# Altium PCB Power.PcbDoc (part 2 of 2)
Units mil, origin at the board's own origin, x right, y up, seen from the top; angles counter-clockwise.
Board outline 3000 x 2825 mil, 4 copper layers (Top Layer, Layer 1, Layer 2, Bottom Layer), stack 26.556 mil thick; 35 components, 15 nets, 160 pads, 64 vias.
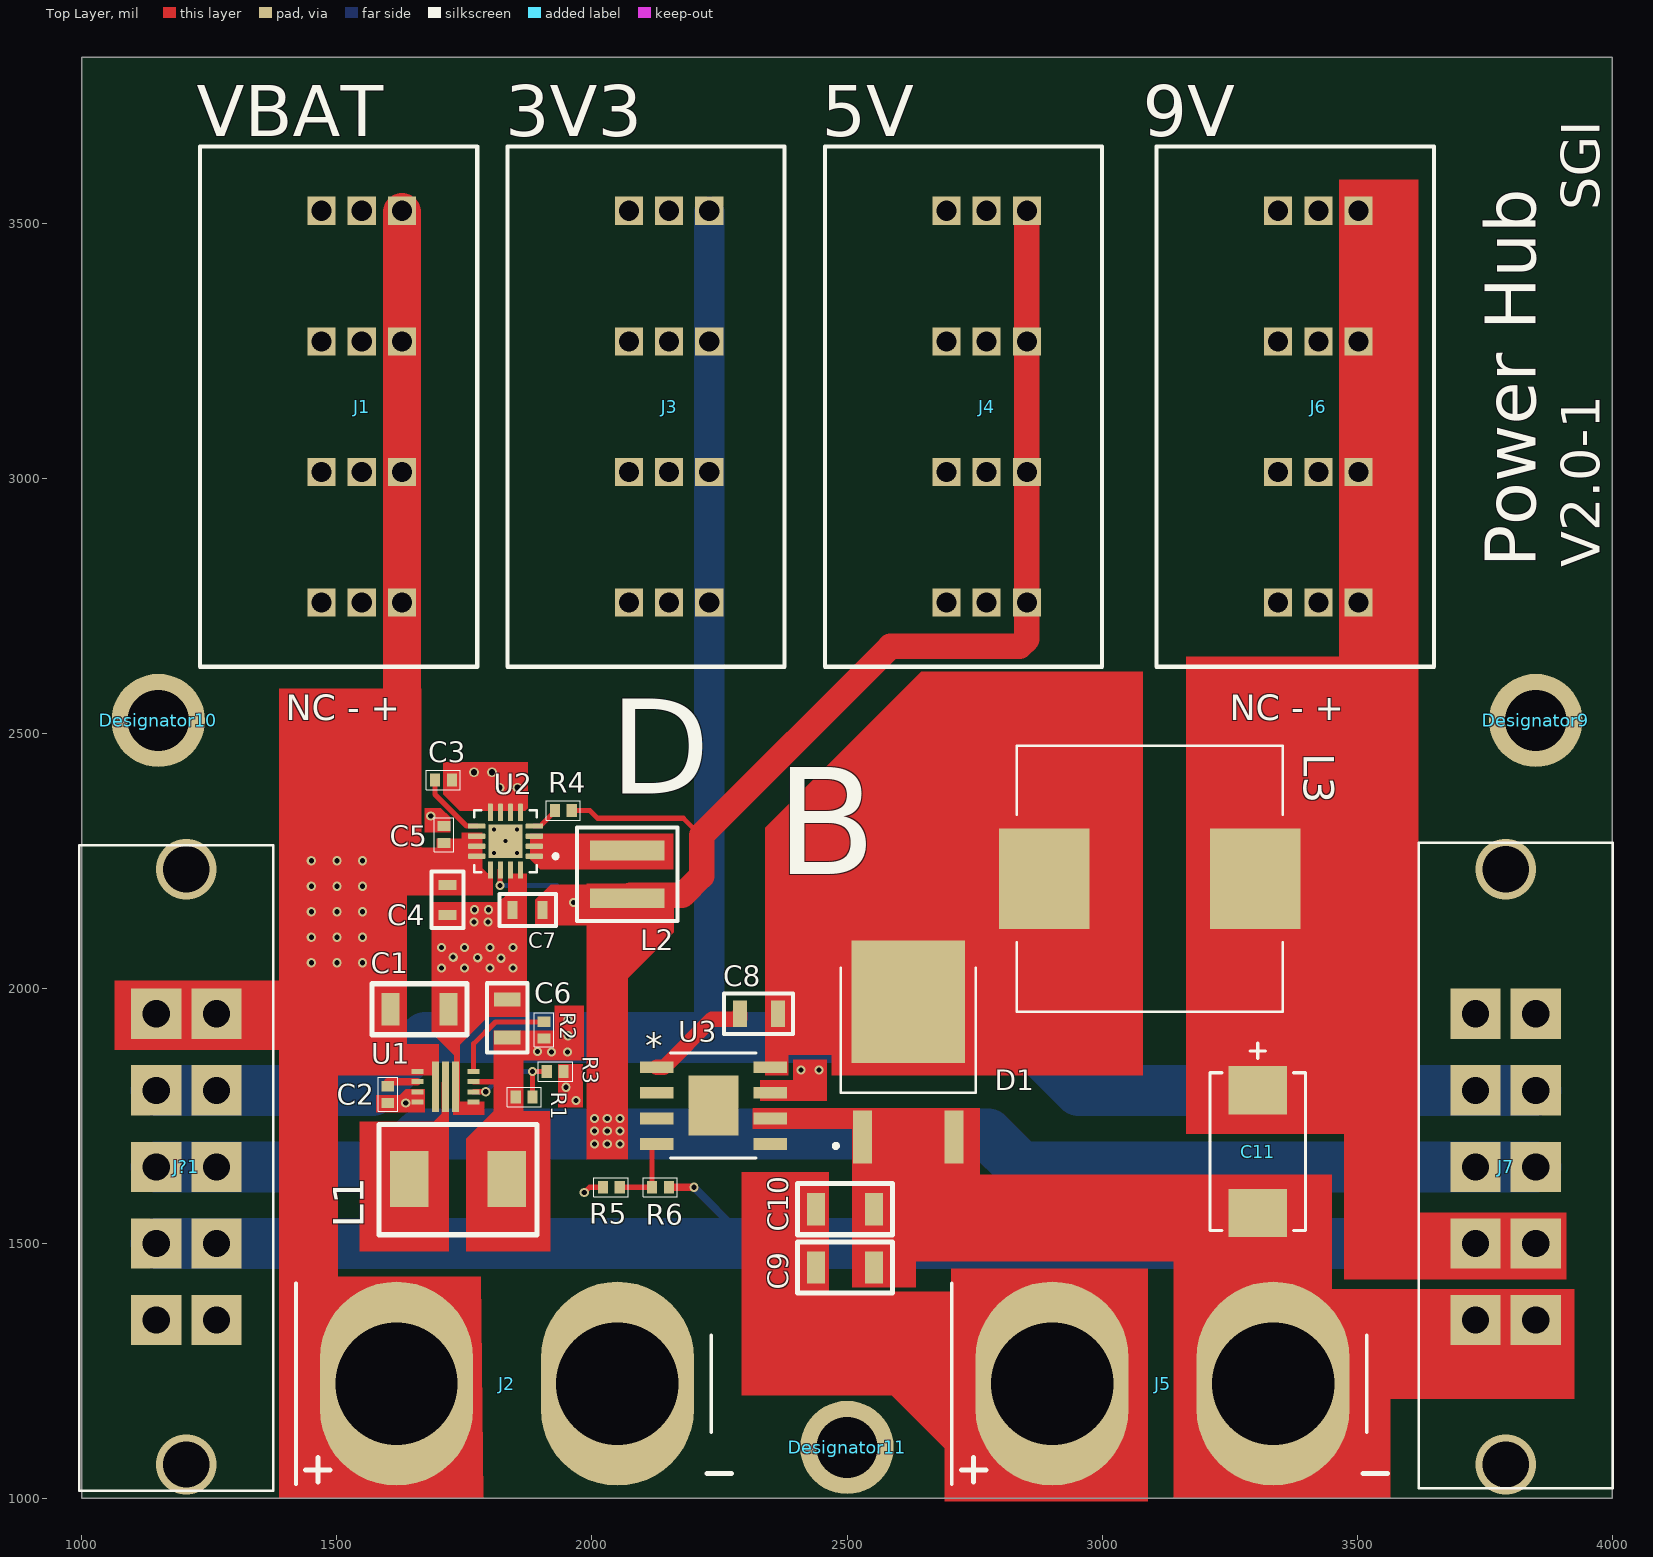
[diagram p0: Top Layer view]

## Part data (continued)
R5: library part CRCW04021K58FKED, "RES SMD 1.58K OHM 1% 1/16W 0402", Capacitance=10uF, Case/Package=0603, Case Code (Metric)=1608, Dielectric=X5R, Dielectric Material=Ceramic, Max Operating Temperature=85°C, Min Operating Temperature=-55°C, Package Quantity=1, Supplier Part Number 1=541-1.58KLCT-ND, Tolerance=20%, Voltage Rating=25V, Case Code (Imperial)=0603, ComponentLink1Description=http://components.arrow.com/part/dataview/0323_06887183?src-supplier=Arrow+Europe, ComponentLink1URL=http://components.arrow.com/part/dataview/0323_06887183?src-supplier=Arrow+Europe, ComponentLink2Description=http://www.farnell.com/datasheets/2792994.pdf?src-supplier=Farnell, ComponentLink2URL=http://www.farnell.com/datasheets/2792994.pdf?src-supplier=Farnell, ComponentLink3Description=http://www.farnell.com/datasheets/2291921.pdf?src-supplier=Avnet, ComponentLink3URL=http://www.farnell.com/datasheets/2291921.pdf?src-supplier=Avnet, ComponentLink4Description=http://www.farnell.com/datasheets/2792994.pdf?src-supplier=Newark, ComponentLink4URL=http://www.farnell.com/datasheets/2792994.pdf?src-supplier=Newark, ComponentLink5Description=http://www.farnell.com/datasheets/2291921.pdf?src-supplier=Newark, ComponentLink5URL=http://www.farnell.com/datasheets/2291921.pdf?src-supplier=Newark, ComponentLink6Description=http://www.farnell.com/datasheets/2792994.pdf?src-supplier=Element14, ComponentLink6URL=http://www.farnell.com/datasheets/2792994.pdf?src-supplier=Element14, ComponentLink7Description=http://www.farnell.com/datasheets/1913358.pdf?src-supplier=Element14, ComponentLink7URL=http://www.farnell.com/datasheets/1913358.pdf?src-supplier=Element14, ComponentLink8Description=https://product.tdk.com/info/en/catalog/datasheets/mlcc_commercial_general_en.pdf?src-supplier=Digi-Key, ComponentLink8URL=https://product.tdk.com/info/en/catalog/datasheets/mlcc_commercial_general_en.pdf?src-supplier=Digi-Key, ComponentLink9Description=http://www.farnell.com/datasheets/2291921.pdf?src-supplier=RSComponents, ComponentLink9URL=http://www.farnell.com/datasheets/2291921.pdf?src-supplier=RSComponents, ComponentLink10Description=http://www.farnell.com/datasheets/2291921.pdf?src-supplier=Verical, ComponentLink10URL=http://www.farnell.com/datasheets/2291921.pdf?src-supplier=Verical, ComponentLink11Description=http://www.farnell.com/datasheets/2291921.pdf?src-supplier=Mouser, ComponentLink11URL=http://www.farnell.com/datasheets/2291921.pdf?src-supplier=Mouser, ComponentLink12Description=http://www.farnell.com/datasheets/2291921.pdf?src-supplier=Quest, ComponentLink12URL=http://www.farnell.com/datasheets/2291921.pdf?src-supplier=Quest, ComponentLink13Description=http://www.farnell.com/datasheets/2291921.pdf?src-supplier=TTI, ComponentLink13URL=http://www.farnell.com/datasheets/2291921.pdf?src-supplier=TTI, Composition=Ceramic, Depth=0.8mm, Height=0.8mm, Lead Free="Lead Free", Length=1.6mm, Mount="Surface Mount", Packaging="Tape and Reel", REACH SVHC="No SVHC", RoHS=Yes, Supplier 1=Digi-Key, Termination=SMD/SMT, Thickness=0.039inch, Voltage Rating (DC)=25V, Weight=7.1E-05oz, Width=0.8mm
R6: library part CRCW040210K0FKEDC, "RES SMD 10K OHM 1% 1/16W 0402", Capacitance=10uF, Case/Package=0603, Case Code (Metric)=1608, Dielectric=X5R, Dielectric Material=Ceramic, Max Operating Temperature=85°C, Min Operating Temperature=-55°C, Package Quantity=1, Supplier Part Number 1=541-3959-1-ND, Tolerance=20%, Voltage Rating=25V, Case Code (Imperial)=0603, ComponentLink1Description=http://components.arrow.com/part/dataview/0323_06887183?src-supplier=Arrow+Europe, ComponentLink1URL=http://components.arrow.com/part/dataview/0323_06887183?src-supplier=Arrow+Europe, ComponentLink2Description=http://www.farnell.com/datasheets/2792994.pdf?src-supplier=Farnell, ComponentLink2URL=http://www.farnell.com/datasheets/2792994.pdf?src-supplier=Farnell, ComponentLink3Description=http://www.farnell.com/datasheets/2291921.pdf?src-supplier=Avnet, ComponentLink3URL=http://www.farnell.com/datasheets/2291921.pdf?src-supplier=Avnet, ComponentLink4Description=http://www.farnell.com/datasheets/2792994.pdf?src-supplier=Newark, ComponentLink4URL=http://www.farnell.com/datasheets/2792994.pdf?src-supplier=Newark, ComponentLink5Description=http://www.farnell.com/datasheets/2291921.pdf?src-supplier=Newark, ComponentLink5URL=http://www.farnell.com/datasheets/2291921.pdf?src-supplier=Newark, ComponentLink6Description=http://www.farnell.com/datasheets/2792994.pdf?src-supplier=Element14, ComponentLink6URL=http://www.farnell.com/datasheets/2792994.pdf?src-supplier=Element14, ComponentLink7Description=http://www.farnell.com/datasheets/1913358.pdf?src-supplier=Element14, ComponentLink7URL=http://www.farnell.com/datasheets/1913358.pdf?src-supplier=Element14, ComponentLink8Description=https://product.tdk.com/info/en/catalog/datasheets/mlcc_commercial_general_en.pdf?src-supplier=Digi-Key, ComponentLink8URL=https://product.tdk.com/info/en/catalog/datasheets/mlcc_commercial_general_en.pdf?src-supplier=Digi-Key, ComponentLink9Description=http://www.farnell.com/datasheets/2291921.pdf?src-supplier=RSComponents, ComponentLink9URL=http://www.farnell.com/datasheets/2291921.pdf?src-supplier=RSComponents, ComponentLink10Description=http://www.farnell.com/datasheets/2291921.pdf?src-supplier=Verical, ComponentLink10URL=http://www.farnell.com/datasheets/2291921.pdf?src-supplier=Verical, ComponentLink11Description=http://www.farnell.com/datasheets/2291921.pdf?src-supplier=Mouser, ComponentLink11URL=http://www.farnell.com/datasheets/2291921.pdf?src-supplier=Mouser, ComponentLink12Description=http://www.farnell.com/datasheets/2291921.pdf?src-supplier=Quest, ComponentLink12URL=http://www.farnell.com/datasheets/2291921.pdf?src-supplier=Quest, ComponentLink13Description=http://www.farnell.com/datasheets/2291921.pdf?src-supplier=TTI, ComponentLink13URL=http://www.farnell.com/datasheets/2291921.pdf?src-supplier=TTI, Composition=Ceramic, Depth=0.8mm, Height=0.8mm, Lead Free="Lead Free", Length=1.6mm, Mount="Surface Mount", Packaging="Tape and Reel", REACH SVHC="No SVHC", RoHS=Yes, Supplier 1=Digi-Key, Termination=SMD/SMT, Thickness=0.039inch, Voltage Rating (DC)=25V, Weight=7.1E-05oz, Width=0.8mm
U1: "3-17V 4.0A Step-Down Converter with 1% accuracy and PFM/Forced-PWM in 2x3QFN", Case/Package=VQFN, Manufacturer 1="Texas Instruments", Max Input Voltage=17V, Max Operating Temperature=125°C, Max Output Voltage=12V, Min Input Voltage=3V, Min Operating Temperature=-40°C, Min Output Voltage=800mV, Output Current=4A, Supplier Part Number 1=296-50117-1-ND, Switching Frequency=1MHz, ComponentLink1Description=http://www.ti.com/lit/ds/symlink/tps62136.pdf?src-supplier=Digi-Key, ComponentLink1URL=http://www.ti.com/lit/ds/symlink/tps62136.pdf?src-supplier=Digi-Key, Manufacturer Part Number 1=TPS621361RGXR, Mount="Surface Mount", Number of Outputs=1, Number of Pins=11, Output Configuration=Positive, Output Type=Adjustable, Packaging="Cut Tape", Pricing 1="1=2.15000, 10=1.93500, 25=1.82520, 100=1.46000, 250=1.27752, 500=1.24100, 1000=0.98550 (USD)", RoHS=No, Stock 1=3019, Supplier 1=Digi-Key, Synchronous Rectifier=Yes
U2: "Buck Switching Regulator IC Positive Fixed 5V 1 Output 3A 16-VFQFN Exposed Pad", Package="VQFN-16 Texas Instruments", Supplier Part Number 1=296-40835-1-ND, Availability=Unavailable, MF="Texas Instruments", MP=TPS62133AQRGTRQ1, Price=None, SnapEDA_Link=https://www.snapeda.com/parts/TPS62133AQRGTRQ1/Texas%20Instruments/view-part/454614/?ref=snap, Supplier 1=Digi-Key
U3: "IC REG BUCK ADJUSTABLE 5A 8SOPWR", Supplier Part Number 1=296-23750-1-ND, Supplier 1=Digi-Key

## Via types
v1: diameter 18, hole 10, Top Layer to Bottom Layer, tented both sides, 56 vias
v2: diameter 19, hole 12, Top Layer to Bottom Layer, tented both sides, 4 vias
v3: diameter 118.11, hole 90.55, Top Layer to Bottom Layer, tented both sides, 4 vias

## Nets (pads, with @x,y where several pads share a name; then routed paths per layer and width w, separated by ;. In a path a pad name is that pad's centre, name@x,y a point inside that pad or via, vN(x,y) a via of type N, cw(c..) or ccw(c..) an arc to the next point about the centre after c; other vN are vias at no path point)
3V3: C6.2 J3.1 J3.4 J3.7 J3.10 J7.4 J?1.2 L1.2 R1.1 R2.1 U1.6 | length 4466
  Top Layer w10: U1.6 1825.84,1816.84 1826,1817
  Bottom Layer w60: 2217,1904 2230,1904 2230,2754.09 2230,3010 2230,3265.91 J3.1@2230,3521.81
  Bottom Layer w100: J?1.2@1145.94,1800 1264.06,1800 1569.49,1800 1673.49,1904 2217,1904 ; 2230,1904 2850.74,1904 2954.74,1800 3731.89,1800 J7.4@3850,1800
  other v1: 1921,1875 1952,1875 1893,1876 1953,1907 1953,1939
5V: C7.2 J4.1 J4.4 J4.7 J4.10 J7.3 J?1.3 L2.2 R4.1 U2.14 | length 5101.9
  Top Layer w10: v1(1820,2201.35) 1820,2231.85 U2.14 ; R4.1 1995.73,2348.35 2010.73,2333.35 2179,2333.35 2213.67,2298.67
  Top Layer w50: L2.2 2074.71,2182.4 2177.4,2182.4 2215,2220 2215,2300 2585,2670 2838.19,2670 2852.48,2684.29 2852.48,2758.19 2852.48,3014.09 2852.48,3270 J4.1@2852.48,3525.91
  Bottom Layer w10: v1(1820,2201.35) 1931,2201.35 v1(1964,2168.35)
  Bottom Layer w100: J?1.3@1145.94,1650 1264.06,1650 1600.51,1650 1664.51,1714 2776,1714 2840,1650 3731.89,1650 J7.3@3850,1650
  other v1: 2005,1695 2030,1695 2055,1695 2005,1720 2030,1720 2055,1720 2005,1745 2030,1745 2055,1745
9V: C11.1 J6.1 J6.4 J6.7 J6.10 J7.2 J?1.4 L3.2 R6.1 | length 2900.3
  Top Layer w15: R6.1 v1(2200,1610)
  Bottom Layer w15: v1(2200,1610) 2290,1520 2290,1500
  Bottom Layer w100: J?1.4@1145.94,1500 1264.06,1500 2290,1500 3731.89,1500 J7.2@3850,1500
FB: R1.2 R3.1 U1.5 | length 209.8
  Top Layer w10: U1.5 v1(1791.95,1797.16) ; R1.2 v1(1883.54,1837) R3.1
  Bottom Layer w10: v1(1791.95,1797.16) 1831.79,1837 v1(1883.54,1837)
GND: C1.1 C2.1 C3.1 C4.1 C5.1 C6.1 C7.1 C9.1 C10.1 C11.2 D1.1 D1.3 J1.2 J1.5 J1.8 J1.11 J2.2 J3.2 J3.5 J3.8 J3.11 J4.2 J4.5 J4.8 J4.11 J5.2 J6.2 J6.5 J6.8 J6.11 J7.1 J?1.5 R3.2 R5.2 U1.3 U1.4 U1.10 U1.11 U2.5 U2.6 U2.7 U2.8 U2.15 U2.16 U2.17 U2.17_1 U2.17_2 U2.17_3 U2.17_4 U2.17_5 U3.6 | length 40.6
  Top Layer w10: v1(1985,1600) 1995,1610 R5.2
  other v1: 1635,1775 1969,1780 1949,1806 1705,2040 1750,2040 1800,2040 1845,2040 1822,2059 1776,2060 1728,2061 1705,2080 1750,2080 1800,2080 1845,2080 1769,2130 1796,2130 1770,2154 1797,2154 1684,2338
  other v2: 1819,2393.35 1854,2393.35 1769,2423.35 1804,2423.35
NetC8_1: C8.1 U3.1 | length 212.2
  Top Layer w30: U3.1 2141,1845 2235.41,1939.41 2288.78,1939.41 2290,1940.63 C8.1
NetC8_2: C8.2 D1.2 L3.1 U3.8
NetR5_2: R5.1 R6.2 U3.4 | length 153.4
  Top Layer w10: R5.1 R6.2 2118,1688.5 2124.5,1695 U3.4
PG: R4.2 U2.4 | length 54.5
  Top Layer w10: U2.4 1898.84,2317.87 1921.91,2340.94 1922.46,2340.94 1927.46,2345.94 R4.2
PG3: R2.2 U1.7 | length 210.5
  Top Layer w10: U1.7 1768.12,1891.26 1810.86,1934 1905.46,1934 R2.2
PVIN: C1.2 C4.2 C5.2 C9.2 C10.2 J1.1 J1.4 J1.7 J1.10 J2.1 J5.1 J7.5 J?1.1 U1.1 U1.8 U2.10 U2.11 U2.12 U2.13 U3.7 | length 1309.3
  Top Layer w75: 1600,2240 1627.48,2240 1627.48,2754.09 1627.48,3010 1627.48,3265.91 J1.1@1627.48,3521.81
  other v1: 2410,1840 2445,1840 1450,2050 1500,2050 1550,2050 1450,2100 1500,2100 1550,2100 1450,2150 1500,2150 1550,2150 1450,2200 1500,2200 1550,2200 1450,2250 1500,2250 1550,2250
SS_TR: C2.2 U1.9 | length 66.7
  Top Layer w15: C2.2 1600,1816.84 U1.9
SS_TR_5: C3.2 U2.9 | length 135.6
  Top Layer w10: C3.2 1692.46,2379.84 1754,2318.31 U2.9@1774.04,2318.31
SW: L1.1 U1.2
SW2: L2.1 U2.1 U2.2 U2.3
pads on no net: Designator9.1 Designator10.1 Designator11.1 J1.3 J1.6 J1.9 J1.12 J3.3 J3.6 J3.9 J3.12 J4.3 J4.6 J4.9 J4.12 J6.3 J6.6 J6.9 J6.12 U3.2 U3.3 U3.5 U3.EPAD
copper on no net:
  other v3: 1205,1066.54 3790.94,1066.54 1205,2233.46 3790.94,2233.46

## Polygon pours and split planes (outlines as drawn)
PVIN on Layer 1 "Layer 1-PVIN" (solid, pour order 8): 1000,3825 4000,3825 4000,1000 1000,1000
GND on Layer 1 "Layer 1-GND" (solid, pour order 4): 1000,3825 1000,1000 4000,1000 4000,3825
PVIN on Bottom Layer "Bottom Layer-PVIN" (solid, pour order 18): 1933,1850
no net on Bottom Layer "Bottom Layer-No Net" (solid, pour order 10): 1000,4050
PVIN on Layer 2 "Layer 2-PVIN" (solid, pour order 14): 1000,3825 4000,3825 4000,1000 1000,1000
PVIN on Layer 2 "Layer 2-PVIN 1" (solid, pour order 16): 4250,3900

## Other copper
Top Layer:
  region net GND: 1722,2306 1722,2335 1704,2353 1672,2353 1672,2306
  region net GND: 1934,1851 1982,1851 1982,1767 1934,1767
  region net 5V: 2070,1665 2070,2020 2160,2110 2160,2205 1990,2205 1990,1665
  region net 9V: 3465,3585 3465,2650 3165,2650 3165,1715 3475,1715 3475,1430 3910,1430 3910,1560 3620,1560 3620,3585
  region net PVIN: 2691.5,1098.25 2587.75,1202 2294,1202 2294,1639.5 2464,1639.5 2464,1405 2704,1405 2704,1450 3089,1450 3089,994.5 2691.5,994.5
  region net GND: 3450,1410 3925,1410 3925,1195 3565,1195 3565,1000 3140,1000 3140,1465 2635,1465 2635,1414 2510,1414 2510,1725 2315,1725 2315,1765 2760,1765 2760,1635 3450,1635
  region net PVIN: 2395,1820 2395,1860 2460,1860 2460,1820 2460,1780 2330,1780 2330,1820
  region net NetC8_2: 2340,2315 2645,2620 3080,2620 3080,1830 2470,1830 2470,1870 2385,1870 2385,1830 2340,1830
  region net GND: 1871.75,1944 1795.75,1944 1740.75,1889 1740.75,1778 1788.75,1778 1788.75,1752 1727.75,1752 1729.75,1869 1685.75,1913 1685.75,2168.35 1817.75,2168.35 1835.75,2186.35 1835.75,2225 1871.75,2225
  region net PVIN: 1386.75,2587 1665,2587 1665,2275 1695.75,2275 1695.75,2293.35 1744.75,2293.35 1744.75,2305 1785.25,2305 1785.25,2293.35 1785.25,2234.85 1794.75,2225.35 1806,2225.35 1806,2182.35 1636.75,2182.35 1636.75,1890 1700,1890 1700,1830 1501.75,1830 1501.75,1435 1781.75,1435 1786.75,1000 1386.75,1000 1386.75,1880 1065,1880 1065,2015 1386.75,2015
  region net GND: 1635,1802 1623,1790 1577,1790 1577,1757 1672,1757 1672,1802
  region net 3V3: 1984,1859 1865,1859 1865,1880 1865,1759 1918,1759 1918,1485 1754,1485 1754,1705 1808,1759 1808,1917 1927,1917 1927,1966 1984,1966
  region net SW: 1706,1816 1706,1754 1690,1738 1545,1738 1545,1485 1719,1485 1719,1816
  region net GND: 1709,2380 1740.65,2348.35 1762,2348.35 1869,2348.35 1874,2353.35 1874,2443.35 1709,2443.35
  region net 5V: 1889,2123.35 1889,2173.35 1919,2203.35 2159,2203.35 2159,2123.35
  region net SW2: 1879,2303.35 1879,2253.35 1899,2233.35 2159,2233.35 2159,2303.35

## Silkscreen, mask and mechanical layers (free items; w line width, h text height)
Top Overlay:
  text "VBAT" at 1225,3670 h100
  text "3V3" at 1830,3670 h100
  text "5V" at 2450,3670 h100
  text "9V" at 3080,3670 h100
  text "SGI" at 3975,3525 h75 r90
  text "Power Hub" at 3850,2825 h100 r90
  text "V2.0-1" at 3975,2825 h75 r90
  text "NC - +" at 1400,2525 h50
  text "NC - +" at 3250,2525 h50
  text "D" at 2035,2320 h320
  text "B" at 2360,2155 h360
Outline:
  lines w5: 1000,2525 1000,1000 ; 1000,1000 1000,3825 4000,3825 4000,1000 1000,1000

## Text inside footprints (layer, text, board x,y; h text height)
U3: Top Overlay "*" at 2104.25,1863 h50; Mechanical 13 "*" at 2162,1815 h50